# Altium PCB main.PcbDoc
Units mm, origin at the board's own origin, x right, y up, seen from the top; angles counter-clockwise.
Board outline 80 x 32 mm, 2 copper layers (Top Layer, Bottom Layer); 38 components, 38 nets, 186 pads, 0 vias.
Unrouted connection lines stored in the file: 87.
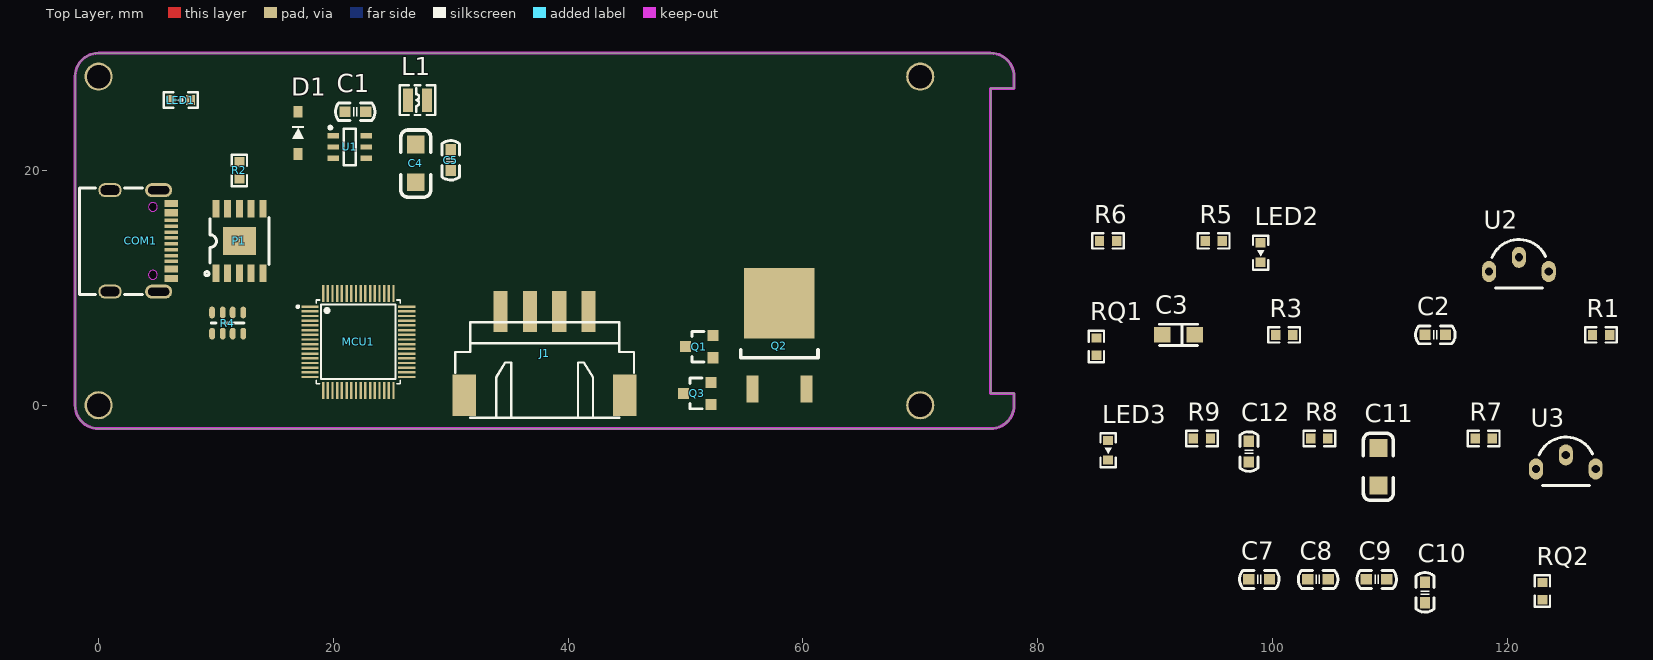
[diagram p0: Top Layer view]
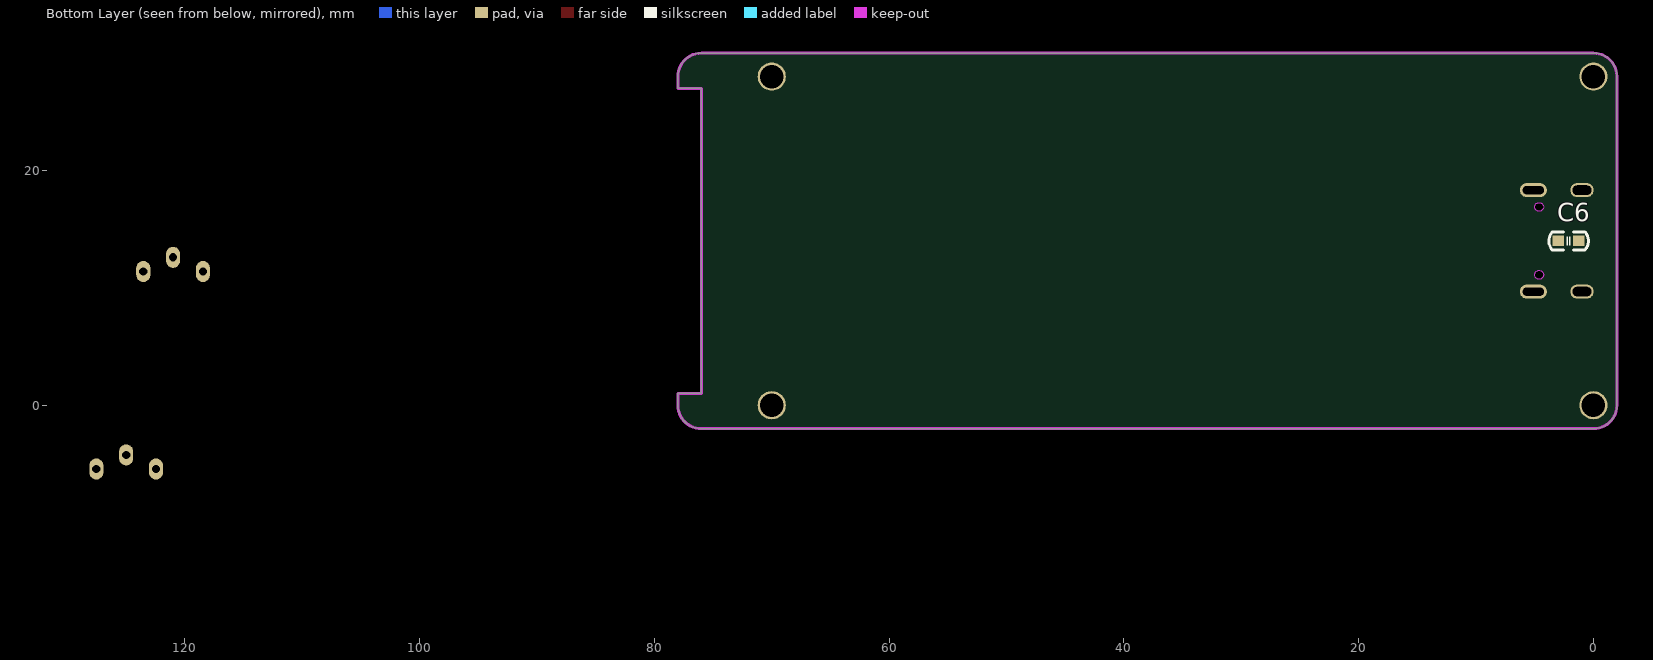
[diagram p1: Bottom Layer view, seen from below]

## Layer stack, top to bottom
Top Solder: solder mask 0.0102, Solder Resist, Dk 3.5
Top Layer: signal copper 0.0356
Dielectric 1: dielectric 0.32, FR-4, Dk 4.8
Bottom Layer: signal copper 0.0356
Bottom Solder: solder mask 0.0102, Solder Resist, Dk 3.5

## Board outline
-2,0 -2,28 cw(c0,28) 0,30 76,30 cw(c76,28) 78,28 78,27 76,27 76,1 78,1 78,0 cw(c76,0) 76,-2 0,-2 cw(c0,0)

## Design rules (kind name [scope] priority, off if disabled: settings)
Clearance [All] p1: gap=0.152 ignorepadtopadclearanceinfootprint=TRUE
PolygonConnect [All] p1: connectstyle=Relief reliefconductorwidth=0.254 reliefentries=4 polygonreliefangle="90 Angle" airgapwidth=0.254
RoutingVias [All] p1: holewidth=0.711 width=1.27 viastyle="Through Hole" minholewidth=0.711 minwidth=1.27 maxholewidth=0.711 maxwidth=1.27
SolderMaskExpansion [All] p1: expansion=0.102 istentingtop=FALSE
Width [All] p1: maxlimit=1.27 minlimit=0.152 preferedwidth=0.254
30 further rules are at their usual default settings.

## Components (designator, comment, footprint, x,y, rotation, side; value= is the part's Value field where it differs from the comment)
C1 "10NF" CAP_0603 22.753,25 r180 top
C2 "100NF" CAP_0603 113,6 r0 top
C3 "22UF" CAP_3216_A 92,6 r0 top
C4 "22UF" CAP_1206 27,19 r90 top
C5 "100NF" CAP_0603 30,21.753 r270 top
C6 "100NF" CAP_0603 3,14 r180 bottom
C7 "100NF" CAP_0603 98,-14.832 r0 top
C8 "100NF" CAP_0603 103,-14.832 r0 top
C9 "100NF" CAP_0603 108,-14.832 r0 top
C10 "100NF" CAP_0603 113,-16.832 r90 top
C11 "22UF" CAP_1206 109,-6.832 r90 top
C12 "100NF" CAP_0603 98,-4.832 r90 top
COM1 "Type-C" USB-TYPE-C_16A 1,14 r270 top
D1 "B5819W" DIODE_SOD123 17,21.4 r90 top
J1 "P4" XH2.54-WS-4P 38,3 r0 top
L1 "2.2UH" Inductance_nr 26.35,26 r90 top
LED1 "LED_R/G/B/Y" LED_0603_R 7,26 r0 top
LED2 "LED_R/G/B/Y" LED_0603_R 99,13 r90 top
LED3 "LED_R/G/B/Y" LED_0603_R 86,-3.832 r90 top
MCU1 "AT32F415RCT7" LQFP64P-7 18,8.4 r0 top
P1 "CH224K" ESSOP_10 10,11.25 r90 top
Q1 "MOS_P" SOT23_3 51.175,5 r0 top
Q2 "MOS_N" TO252_2 58,7 r90 top
Q3 "NPN" SOT23_3 51,1 r0 top
R1 "1K" RESC_0603_2 128,6 r0 top
R2 "10K" RESC_0603_2 12,20 r90 top
R3 "10K" RESC_0603_2 101,6 r0 top
R4 "10K" RESC_0603_4 11,7 r0 top
R5 "10K" RESC_0603_2 95,14 r0 top
R6 "10K" RESC_0603_2 86,14 r0 top
R7 "10K" RESC_0603_2 118,-2.832 r0 top
R8 "10K" RESC_0603_2 104,-2.832 r0 top
R9 "10K" RESC_0603_2 94,-2.832 r0 top
RQ1 "19.6k" RESC_0603_2 85,5 r90 top
RQ2 "62k" RESC_0603_2 123,-15.832 r90 top
U1 "RT8259" SOT-23-6 20,22.95 r0 top
U2 "DS18B20" TO_92B 121,12 r0 top
U3 "DS18B20" TO_92B 125,-4.832 r0 top

## Footprints (in the part's own frame and the unit in brackets; to place one, negate y for a bottom-side part, rotate by r counter-clockwise, add the part's x,y. Pads: shape width x height; smd on the part's side, far side on the other; paste and mask are expansions set on the pad)
CAP_0603 [mil]
  rect 38x35 smd: 1(0,0) 2(69,0)
  silkscreen extent -31,-30 101,30, body extent 4,-16 67,16, height 12
CAP_1206 [mil]
  rect 60x60 smd: 1(0,-1) 2(126,-1)
  silkscreen extent -50,-51 175,49, body extent 0,-32 126,31, height 39
CAP_3216_A [mm]
  rect 1.4x1.3 smd: 1(1.4,0) 2(-1.4,0)
  silkscreen extent -1.6,-0.9 1.6,0.9, body extent -1.6,-0.8 1.6,0.8, height 1.6
DIODE_SOD123 [mm]
  rect 1x0.75 smd: 1(0,0) 2(3.6,0)
  silkscreen extent 1.3,-0.5 2.4,0.5, body extent -0.05,-0.8 3.65,0.8, height 1.27
ESSOP_10 [mm]
  rect 1.5x0.6 smd mask+0.051: 1(0,0) 2(0,-1) 3(0,-2) 4(0,-3) 5(0,-4) 6(5.5,-4) 7(5.5,-3) 8(5.5,-2) 9(5.5,-1) 10(5.5,0)
  rect 2.4x2.8 smd mask+0.051: 11(2.75,-2)
  silkscreen extent -0.21,-4.5 4.75,0.94, body extent -0.35,-4.5 5.65,0.5, height 1.9
Inductance_nr [mm]
  rect 2x0.85 smd: 1(0,0) 2(0,-1.65)
  silkscreen extent -1.27,-2.35 1.27,0.7, body extent -1,-2.07 1,0.43, height 1.1
LED_0603_R [mm]
  rect 0.8x0.85 smd: 1(-0.832,0) 2(0.832,0)
  silkscreen extent -1.45,-0.65 1.45,0.65, body extent -0.81,-0.4 0.81,0.4, height 0.6
LQFP64P-7 [mil]
  rect 57.5x7.9 smd mask+2: 1(0,0) 2(0,-15.7) 3(0,-31.5) 4(0,-47.2) 5(0,-63) 6(0,-78.7) 7(0,-94.5) 8(0,-110.2) 9(0,-126) 10(0,-141.7) 11(0,-157.5) 12(0,-173.2) 13(0,-189) 14(0,-204.7) 15(0,-220.5) 16(0,-236.2) 33(325.2,-236.2) 34(325.2,-220.5) 35(325.2,-204.7) 36(325.2,-189) 37(325.2,-173.2) 38(325.2,-157.5) 39(325.2,-141.7) 40(325.2,-126) 41(325.2,-110.2) 42(325.2,-94.5) 43(325.2,-78.7) 44(325.2,-63) 45(325.2,-47.2) 46(325.2,-31.5) 47(325.2,-15.7) 48(325.2,0)
  rect 7.9x57.5 smd mask+2: 17(44.5,-280.7) 18(60.2,-280.7) 19(76,-280.7) 20(91.7,-280.7) 21(107.5,-280.7) 22(123.2,-280.7) 23(139,-280.7) 24(154.7,-280.7) 25(170.5,-280.7) 26(186.2,-280.7) 27(202,-280.7) 28(217.7,-280.7) 29(233.5,-280.7) 30(249.2,-280.7) 31(265,-280.7) 32(280.7,-280.7) 49(280.7,44.5) 50(265,44.5) 51(249.2,44.5) 52(233.5,44.5) 53(217.7,44.5) 54(202,44.5) 55(186.2,44.5) 56(170.5,44.5) 57(154.7,44.5) 58(139,44.5) 59(123.2,44.5) 60(107.5,44.5) 61(91.7,44.5) 62(76,44.5) 63(60.2,44.5) 64(44.5,44.5)
  silkscreen extent -44,-259 303,23, body extent -15,-295 340,59, height 50
RESC_0603_2 [mm]
  rect 0.8x0.85 smd: 1(-0.73,0) 2(0.73,0)
  silkscreen extent -1.35,-0.65 1.35,0.65, body extent -0.8,-0.4 0.8,0.4, height 0.38
RESC_0603_4 [mm]
  oval 0.5x1 smd: 1(-1.327,-0.9) 2(-1.327,0.9) 3(-0.425,-0.9) 4(-0.425,0.9) 5(0.425,-0.9) 6(0.425,0.9) 7(1.327,-0.9) 8(1.327,0.9)
  silkscreen extent -1.4,0 1.4,0, body extent -1.6,-0.8 1.6,0.8, height 0.5
SOT23_3 [mm]
  rect 0.95x0.95 smd: 1(1.175,-0.95) 2(1.175,0.95) 3(-1.175,0)
  silkscreen extent -0.6,-1.3 0.4,1.3, body extent -1.34,-1.5 1.3,1.5, height 1.08
SOT-23-6 [mm]
  rect 1x0.45 smd: 1(0,0) 2(0,-0.95) 3(0,-1.9) 4(2.794,-1.9) 5(2.794,-0.95) 6(2.794,0)
  silkscreen extent -0.38,-2.5 1.91,0.82, body extent -0.01,-2.45 2.8,0.55, height 1.15
TO252_2 [mm]
  rect 2.3x1 smd: 1(-5.6,2.3) 2(-5.6,-2.3)
  rect 6x6 smd: 3(1.7,0)
  silkscreen extent -2.95,-3.29 -2.29,3.29, body extent -5.5,-3.29 4.2,3.29, height 2.3
TO_92B [mm]
  oval 1.2x1.8 hole 0.7: 1(-2.54,-0.6) 2(0,0.6) 3(2.54,-0.6)
  silkscreen extent -2.28,-2 2.27,2.12, body extent -2.8,-2 2.88,1.8, height 7.34
USB-TYPE-C_16A [mm]
  oval 1.199x2.301 hole 0.701 slot 1.801 at 90 deg mask+0.051: 0(-4.32,4.123) 0(4.321,4.123)
  oval 1.199x1.999 hole 0.8 slot 1.6 at 90 deg mask+0.051: 0(-4.32,-0.025) 0(4.321,-0.025)
  round 0 hole 0.65: 0(-2.889,3.592) 0(2.891,3.592)
  rect 0.3x1.151 smd mask+0.05: A5(-1.249,5.179) A6(-0.248,5.177) A7(0.25,5.177) A8(-1.749,5.177) B5(1.751,5.177) B6(0.75,5.177) B7(-0.749,5.177) B8(1.25,5.177)
  rect 0.599x1.151 smd mask+0.05: A9(-2.4,5.174) A12(-3.2,5.174) B1(3.201,5.177) B4(2.401,5.177)
  Keep-Out Layer board cut-out: 3.267,3.625 3.23,3.788 3.126,3.919 2.975,3.991 2.808,3.991 2.657,3.919 2.553,3.788 2.515,3.625 2.515,3.625 2.553,3.462 2.657,3.331 2.808,3.258 2.975,3.258 3.126,3.331 3.23,3.462 3.267,3.625
  Keep-Out Layer board cut-out: -2.514,3.625 -2.551,3.788 -2.655,3.919 -2.806,3.991 -2.973,3.991 -3.124,3.919 -3.229,3.788 -3.266,3.625 -3.266,3.625 -3.229,3.462 -3.124,3.331 -2.973,3.258 -2.806,3.258 -2.655,3.331 -2.551,3.462 -2.514,3.625
  silkscreen extent -4.5,-2.63 4.56,2.75, body extent -4.47,-2.63 4.47,5.27, height 3.25
XH2.54-WS-4P [mm] "长：15mm，宽：8mm，高：6.1mm"
  rect 2x3.5 smd: 0(-6.827,-2.15) 0(6.827,-2.15)
  rect 1.2x3.5 smd: 1(-3.75,4.981) 2(-1.25,4.981) 3(1.25,4.981) 4(3.75,4.981)
  silkscreen extent -7.62,-4.06 7.62,4.06, body extent -7.5,-4 7.5,6.42, height 6.05

## Part data
C1 C2 C4 C5 C6 C7 C8 C9 C10 C11 C12: library part CAP, "CAP  12~50V"
C3: library part CAP_TA, "CAP  6~12V  钽电容"
COM1: library part USB-type_c, "USB"
D1: library part Diode-SM, "Diode_肖特基/二极管"
J1: library part SWD, "Header"
L1: library part Inductor, "Inductor", Code_IEC=1005, Code_JEITA=0402, LatestRevisionDate=29-May-2009, LatestRevisionNote="IPC-7351 Footprint Added.", PackageDescription="Chip Inductor", PackageReference=0402-A, Published=8-Jun-2000, Publisher="Altium Limited"
LED1 LED2 LED3: library part LED_SMT, "LED"
MCU1: "MCU"
P1: "PD\QC"
Q1: library part MOSFET_P, "MOS"
Q2: library part MOSFET_N, "MOS"
R1 R2 R3 R5 R6 R7 R8 R9: library part RES, "RES 贴片"
R4: library part RES_P4, "RES"
RQ1 RQ2: library part RES_quality, "RES"
U1: "DC-DC"
U2 U3: "MODE"

## Free pads (board coordinates)
  round 2.4 hole 2: 0(0,0) 0(0,28) 1(70,28) 2(70,0)

## Nets (pads, with @x,y where several pads share a name; then routed paths per layer and width w, separated by ;. In a path a pad name is that pad's centre, name@x,y a point inside that pad or via, vN(x,y) a via of type N, cw(c..) or ccw(c..) an arc to the next point about the centre after c; other vN are vias at no path point)
BOOT0: MCU1.60
CC1: COM1.A5 P1.7
CC2: COM1.B5 P1.6
CFG3: P1.3 R4.5
D/C: MCU1.43
DN: COM1.A7 COM1.B7 P1.4
DP: COM1.A6 COM1.B6 P1.5
GND: C2.2 C3.2 C4.1 C5.2 C6.2 C7.2 C8.2 C9.2 C10.2 C11.1 C12.2 COM1.A12 COM1.B1 D1.1 J1.4 MCU1.12 MCU1.31 MCU1.63 P1.11 Q2.2 Q3.2 R3.2 R4.2 R4.4 R4.6 R8.1 R9.2 RQ1.1 U1.2 U2.1 U3.1
IO_D1: U2.2
IO_D2: U3.2
KEY: MCU1.2
LED: LED3.2 MCU1.45
MISO: MCU1.35
MOSI: MCU1.36
NetC1_1: C1.1 D1.2 L1.1 U1.6
NetC1_2: C1.2 U1.1
NetC2_1: C2.1 P1.1 R1.1
NetLED1_1: LED1.1 R3.1
NetLED2_1: LED2.1 R6.1
NetLED3_1: LED3.1 R9.1
NetP1_2: P1.2 R4.3
NetP1_8: P1.8 R2.1
NetP1_9: P1.9 R4.1
NetQ1_1: Q1.1 Q3.3 R5.1
NetQ1_3: Q1.3 Q2.1 R8.2
NetQ3_1: Q3.1 R7.1
NetRQ1_2: RQ1.2 RQ2.2 U1.3
NSS: MCU1.33
OUT: C11.2 C12.1 Q2.3 R6.2
PWM: MCU1.58 R7.2
RST: MCU1.7
SCLK: MCU1.34
SWDIO: J1.2 MCU1.46
SWSCK: J1.3 MCU1.49
UART2_RX: MCU1.17
UART2_TX: MCU1.16
VCC: C4.2 C5.1 C6.1 COM1.A9 COM1.B4 LED1.2 LED2.2 Q1.2 R1.2 R2.2 R5.2 U1.5
VDD: C3.1 C7.1 C8.1 C9.1 C10.1 J1.1 L1.2 MCU1.1 MCU1.13 MCU1.32 MCU1.64 RQ2.1 U2.3 U3.3
pads on no net: COM1.0 COM1.A8 COM1.B8 J1.0 MCU1.3 MCU1.4 MCU1.5 MCU1.6 MCU1.8 MCU1.9 MCU1.10 MCU1.11 MCU1.14 MCU1.15 MCU1.18 MCU1.19 MCU1.20 MCU1.21 MCU1.22 MCU1.23 MCU1.24 MCU1.25 MCU1.26 MCU1.27 MCU1.28 MCU1.29 MCU1.30 MCU1.37 MCU1.38 MCU1.39 MCU1.40 MCU1.41 MCU1.42 MCU1.44 MCU1.47 MCU1.48 MCU1.50 MCU1.51 MCU1.52 MCU1.53 MCU1.54 MCU1.55 MCU1.56 MCU1.57 MCU1.59 MCU1.61 MCU1.62 P1.10 R4.7 R4.8 U1.4

## Keep-outs
Keep-Out Layer:
  the board outline again, w0.254

## Silkscreen, mask and mechanical layers (free items; w line width, h text height)
Mechanical 15:
  lines w0.254: -3,14 5,14 ; 0,-2 0,30 ; 70,0 76,0 ; 70,28 76,28